# Altium PCB 20210915_EleksTube_IPS_midextend.PcbDoc
Units mil, origin at the board's own origin, x right, y up, seen from the top; angles counter-clockwise.
Board outline 1338.58 x 1811.03 mil, 2 copper layers (Top Layer, Bottom Layer), stack 55.118 mil thick; 3 components, 11 nets, 32 pads, 0 vias.
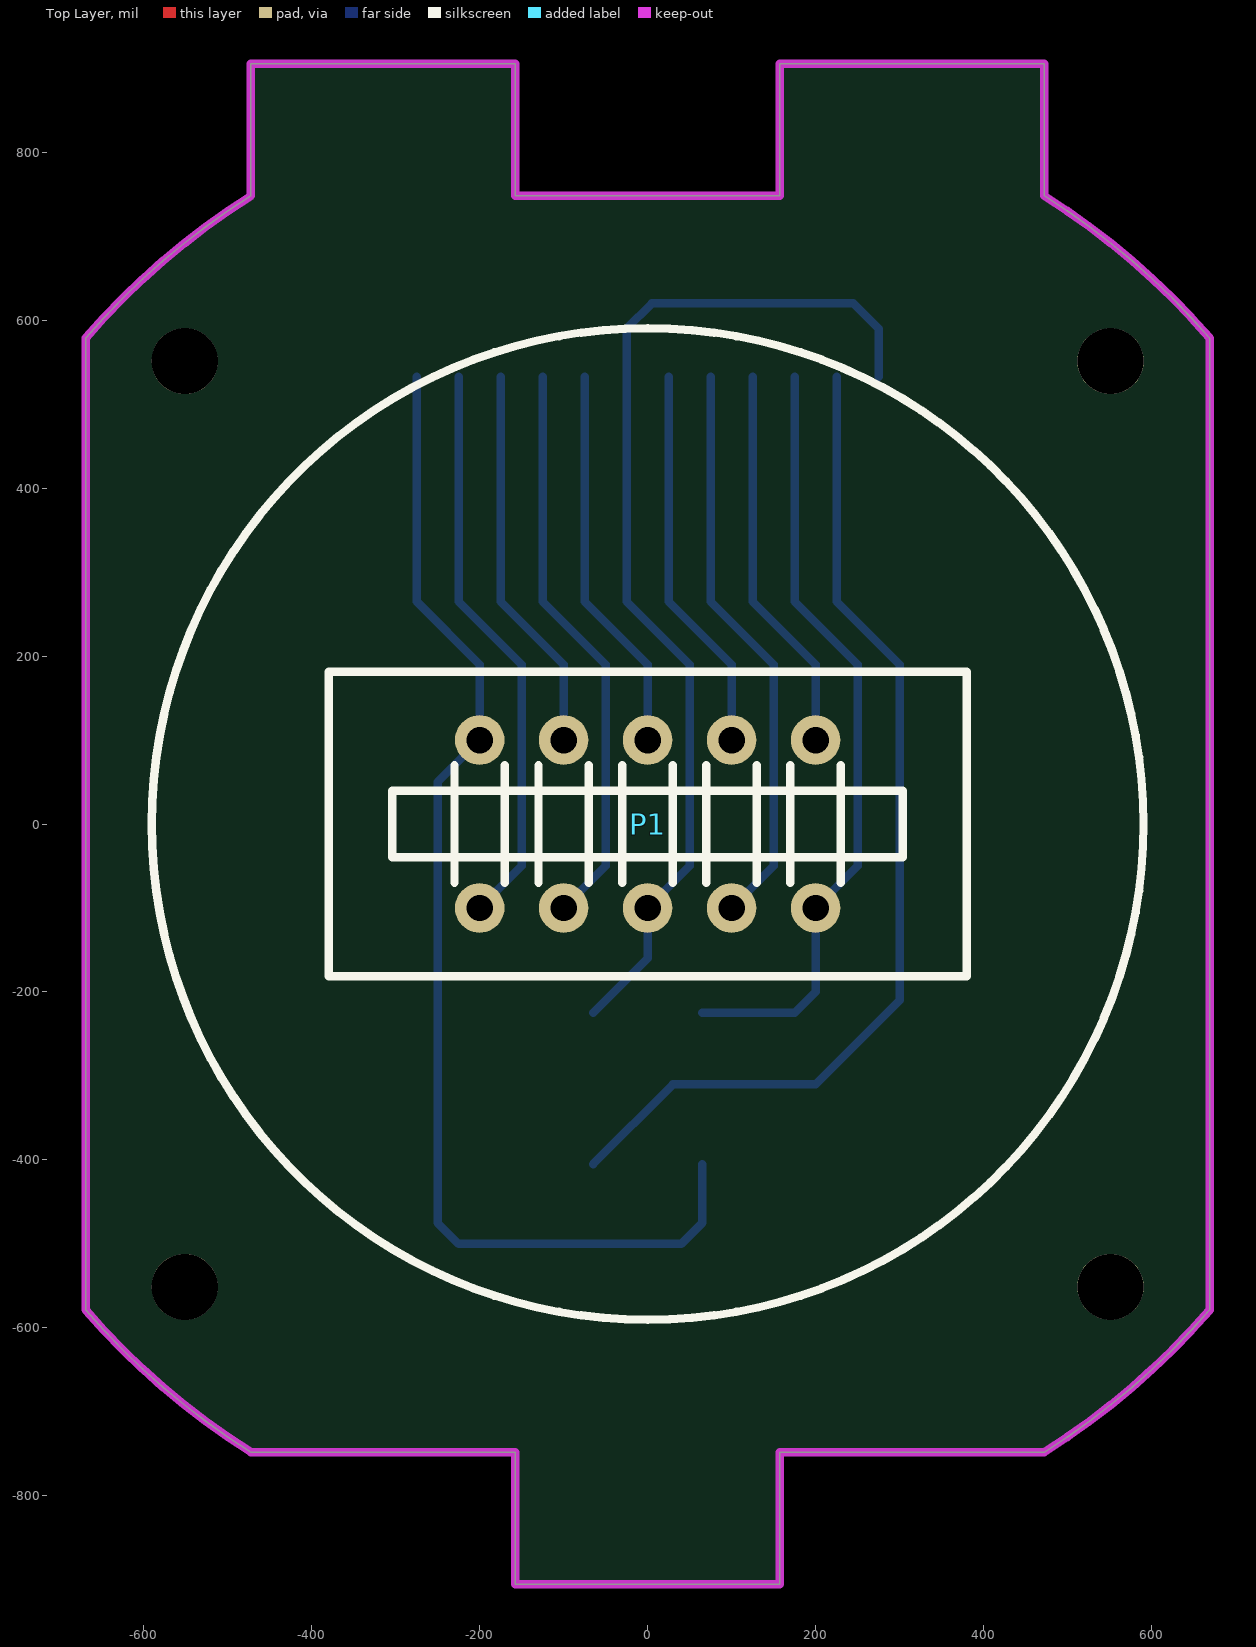
[diagram p0: Top Layer view]
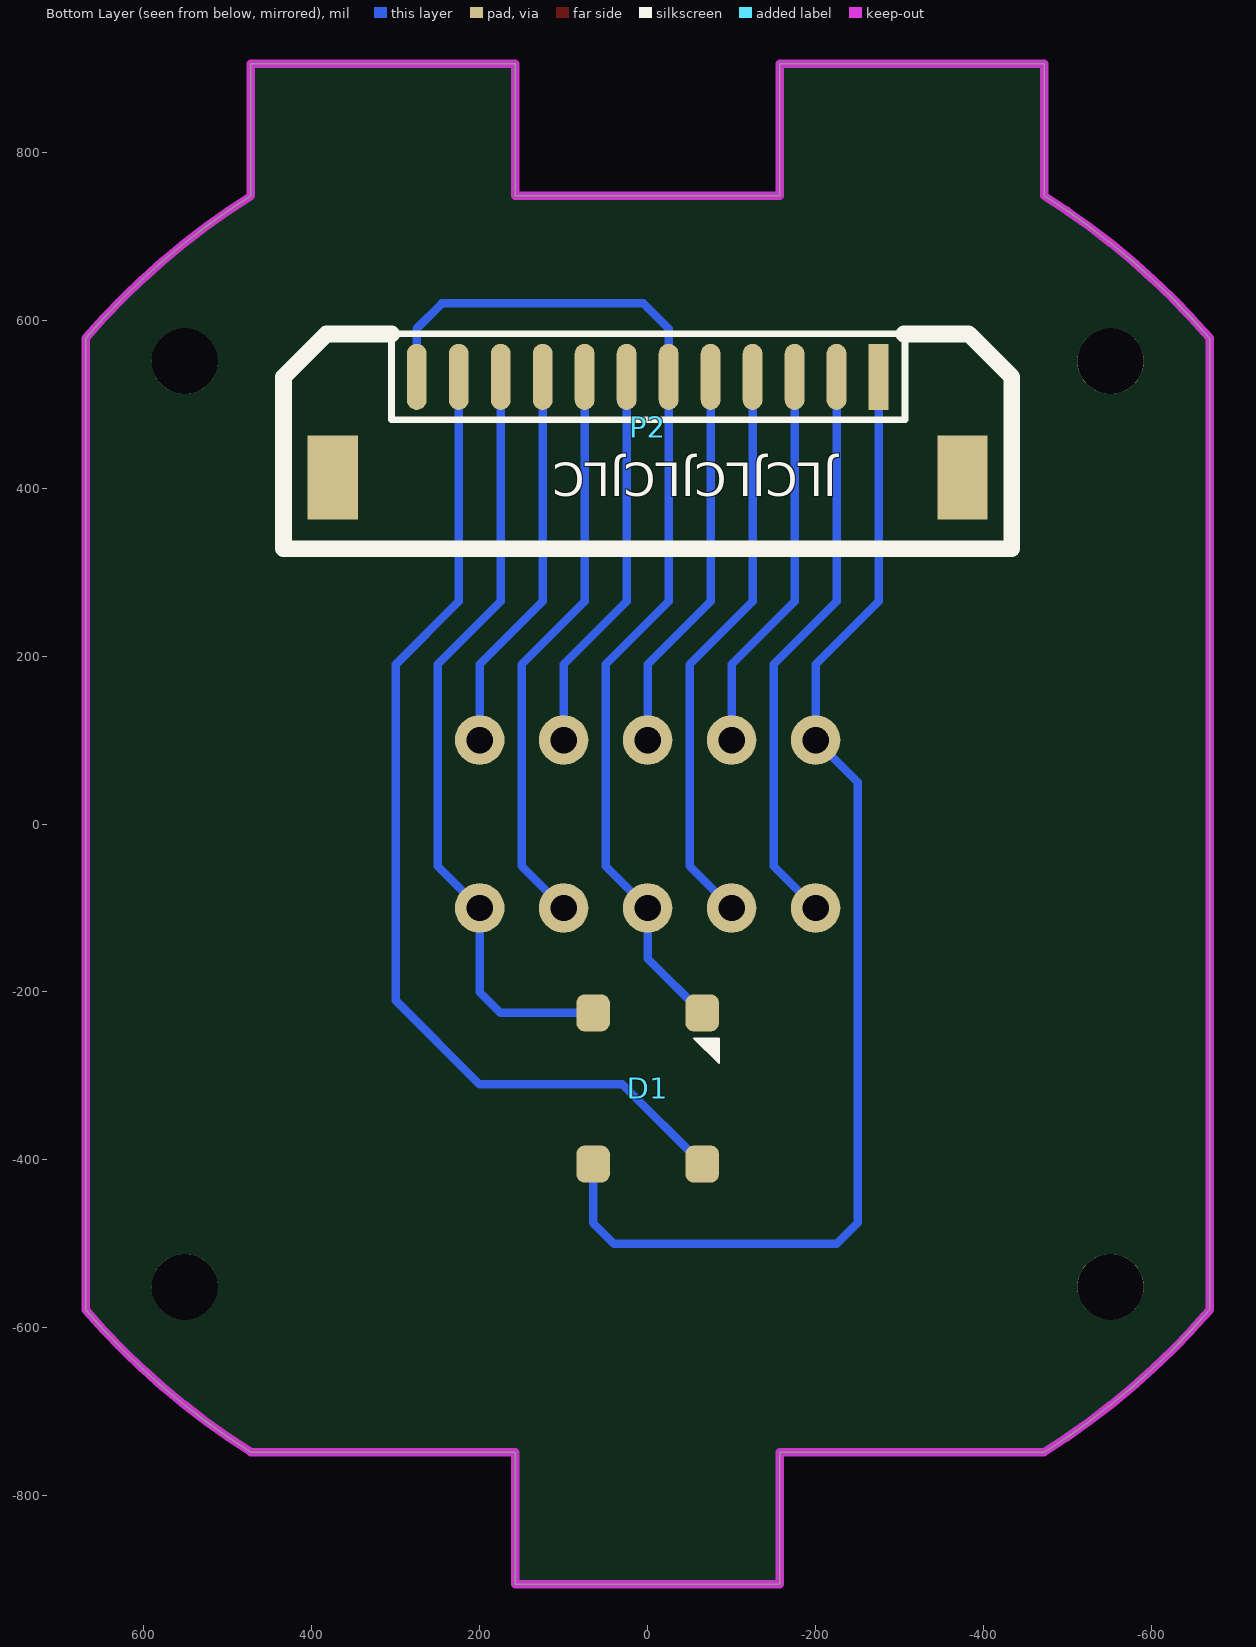
[diagram p1: Bottom Layer view, seen from below]

## Layer stack, top to bottom
Top Solder: solder mask 3.937, Solder Resist, Dk 3.5
Top Layer: signal copper 3.937
Dielectric 1: dielectric 47.2441, FR-4, Dk 4.8
Bottom Layer: signal copper 3.937
Bottom Solder: solder mask 3.937, Solder Resist, Dk 3.5

## Board outline
-669.24,-578.68 ccw(c0,0) -472.44,-748.03 -157.48,-748.03 -157.48,-905.51 157.48,-905.51 157.48,-748.03 472.44,-748.03 ccw(c0,0) 669.22,-578.7 669.29,-578.7 669.29,578.68 669.24,578.68 ccw(c0,0) 472.44,748.03 472.44,905.51 157.48,905.51 157.48,748.03 -157.48,748.03 -157.48,905.51 -472.44,905.51 -472.44,748.03 ccw(c0,0) -669.22,578.7 -669.29,578.7

## Design rules (kind name [scope] priority, off if disabled: settings)
Clearance [All] p1: gap=10
PolygonConnect [All] p1: connectstyle=Relief reliefconductorwidth=10 reliefentries=4 polygonreliefangle="90 Angle" airgapwidth=10
RoutingVias [All] p1: holewidth=28 width=50 viastyle="Through Hole" minholewidth=28 minwidth=50 maxholewidth=28 maxwidth=50
SolderMaskExpansion [All] p1: expansion=4
Width [All] p1: maxlimit=10 minlimit=10 preferedwidth=10
30 further rules are at their usual default settings.

## Components (designator, comment, footprint, x,y, rotation, side; value= is the part's Value field where it differs from the comment)
D1 "RGB" LED_5050_WS2812B 0,-314.96 r90 bottom locked
P1 "GoldFinger-10_F" GoldFinger-10_F 0,0 r0 top locked
P2 "Header 12" SIP12-1.27 0,472.44 r0 bottom locked

## Footprints (in the part's own frame and the unit in brackets; to place one, negate y for a bottom-side part, rotate by r counter-clockwise, add the part's x,y. Pads: shape width x height; smd on the part's side, far side on the other; paste and mask are expansions set on the pad)
GoldFinger-10_F [mm]
  round 1.5 hole 0.8: 1(-5.08,2.54) 2(-2.54,2.54) 3(0,2.54) 4(2.54,2.54) 5(5.08,2.54) 6(5.08,-2.54) 7(2.54,-2.54) 8(0,-2.54) 9(-2.54,-2.54) 10(-5.08,-2.54)
  silkscreen extent -9.65,-4.6 9.65,4.6, body extent -9.65,-4.6 9.65,4.6, height 15.6
LED_5050_WS2812B [mil]
  rrect50% 44x40 smd: 1(-90,65) 2(-90,-65) 3(90,-65) 4(90,65)
  silkscreen extent 30,-85 60,-55, body extent -106,-98 106,98, height 69
SIP12-1.27 [mm]
  rect 0.6x2 smd: 1(-6.985,-1.524)
  oval 0.6x2 smd: 2(-5.715,-1.524) 3(-4.445,-1.524) 4(-3.175,-1.524) 5(-1.905,-1.524) 6(-0.635,-1.524) 7(0.635,-1.524) 8(1.905,-1.524) 9(3.175,-1.524) 10(4.445,-1.524) 11(5.715,-1.524) 12(6.985,-1.524)
  rect 1.524x2.54 smd: ""(-9.525,1.524) ""(9.525,1.524)
  silkscreen extent -11.01,-2.82 11.01,3.68

## Part data
D1: library part LED_5050_WS2812B, "LED"
P1: "Header, 5-Pin, Dual row"
P2: "Header, 12-Pin"

## Free pads (board coordinates)
  round 78.74 hole 78.74: 0(-551.19,551.18) 0(-551.19,-551.19) 0(551.18,551.18) 0(551.18,-551.19)

## Nets (pads, with @x,y where several pads share a name; then routed paths per layer and width w, separated by ;. In a path a pad name is that pad's centre, name@x,y a point inside that pad or via, vN(x,y) a via of type N, cw(c..) or ccw(c..) an arc to the next point about the centre after c; other vN are vias at no path point)
BLK: P1.10 P2.2 | length 684.2
  Bottom Layer w10: P2.2 -225,265 -150,190 -150,-50 P1.10
CS: P1.9 P2.4 | length 684.2
  Bottom Layer w10: P2.4 -125,265 -50,190 -50,-50 P1.9
DC: P1.3 P2.5 | length 463.5
  Bottom Layer w10: P2.5 -75,265 0,190 P1.3
GND: D1.3 P1.8 P2.6 P2.12 | length 1276.1
  Bottom Layer w10: D1.3 0,-159.96 P1.8 50,-50 50,190 -25,265 P2.6 -25,590 5,620 245,620 275,590 P2.12
RES: P1.7 P2.8 | length 684.2
  Bottom Layer w10: P2.8 75,265 150,190 150,-50 P1.7
RGB_LED_IN: D1.4 P1.6 P2.10 | length 929.6
  Bottom Layer w10: D1.4 175.04,-224.96 200,-200 P1.6 250,-50 250,190 175,265 P2.10
RGB_LED_OUT: D1.2 P2.11 | length 1219.3
  Bottom Layer w10: D1.2 29.96,-310 200,-310 300,-210 300,190 225,265 P2.11
SCL: P1.4 P2.7 | length 463.5
  Bottom Layer w10: P2.7 25,265 100,190 P1.4
SDA: P1.5 P2.9 | length 463.5
  Bottom Layer w10: P2.9 125,265 200,190 P1.5
VCC_3V3: P1.2 P2.3 | length 463.5
  Bottom Layer w10: P2.3 -175,265 -100,190 P1.2
VDD_5V: D1.1 P1.1 P2.1 | length 1465
  Bottom Layer w10: P2.1 -275,265 -200,190 P1.1 -250,50 -250,-475 -225,-500 40,-500 65,-475 D1.1
pads on no net: P2.

## Keep-outs
Keep-Out Layer:
  lines w10: -669.29,-578.68 -669.29,578.7 ; -669.24,-578.68 ccw(c0,0) -472.44,-748.03 -157.48,-748.03 -157.48,-905.51 157.48,-905.51 157.48,-748.03 472.44,-748.03 ccw(c0,0) 669.22,-578.7 ; -669.22,578.7 cw(c0,0) -472.44,748.03 -472.44,905.51 -157.48,905.51 -157.48,748.03 157.48,748.03 157.48,905.51 472.44,905.51 472.44,748.03 cw(c0,0) 669.24,578.68 ; 669.29,-578.7 669.29,578.68

## Silkscreen, mask and mechanical layers (free items; w line width, h text height)
Top Overlay:
  circle w10: c0,0 r590.55
Bottom Overlay:
  text "JLCJLCJLCJLC" at -225,430 h40 r180